# Altium PCB v3.0_ser_plytka.PcbDoc
Units mm, origin at the board's own origin, x right, y up, seen from the top; angles counter-clockwise.
Board outline 91 x 25 mm, 2 copper layers (Top Layer, Bottom Layer); 94 components, 70 nets, 327 pads, 311 vias.
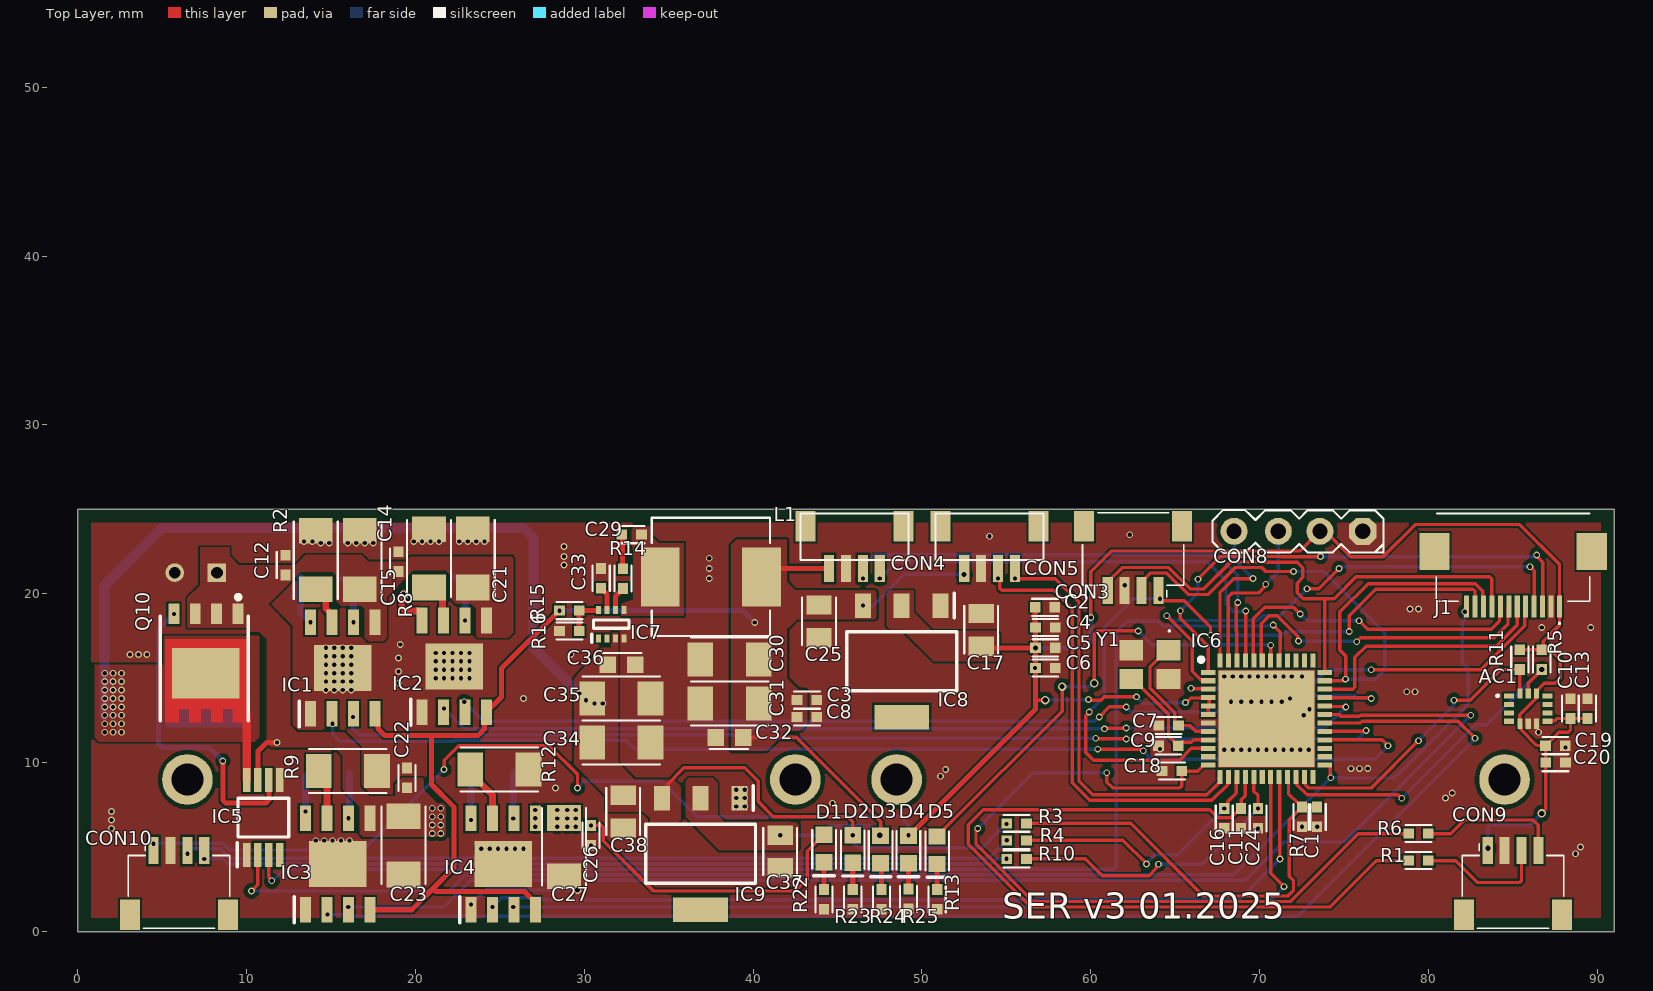
[diagram p0: Top Layer view]
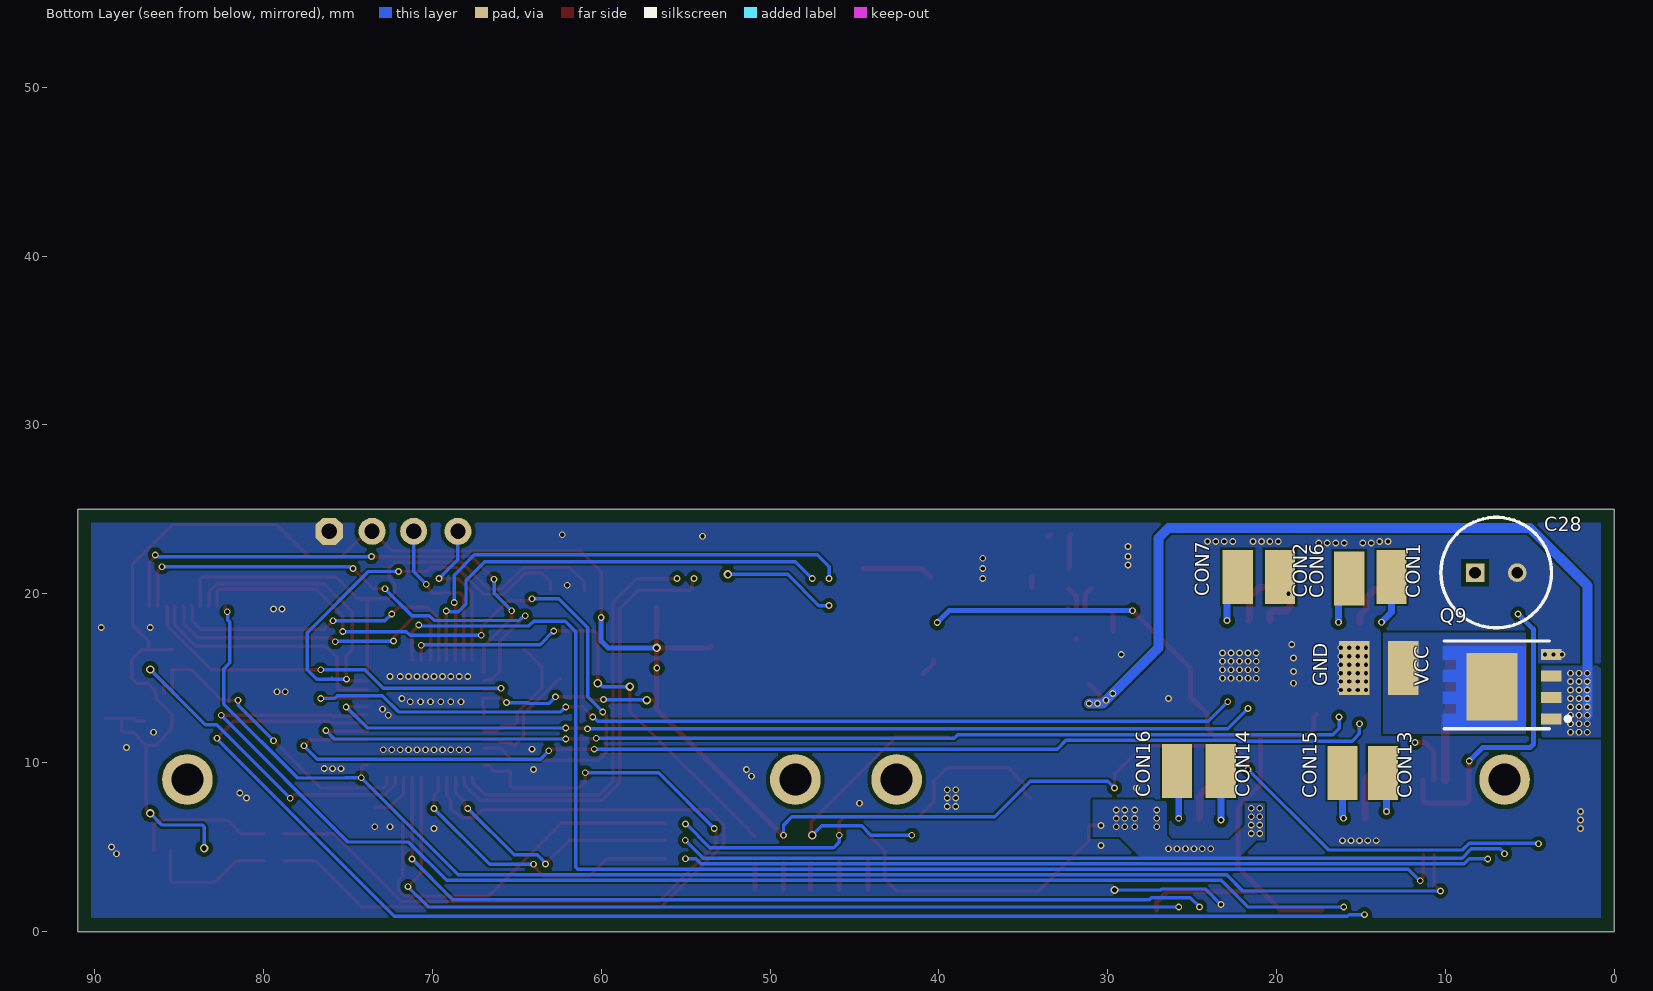
[diagram p1: Bottom Layer view, seen from below]
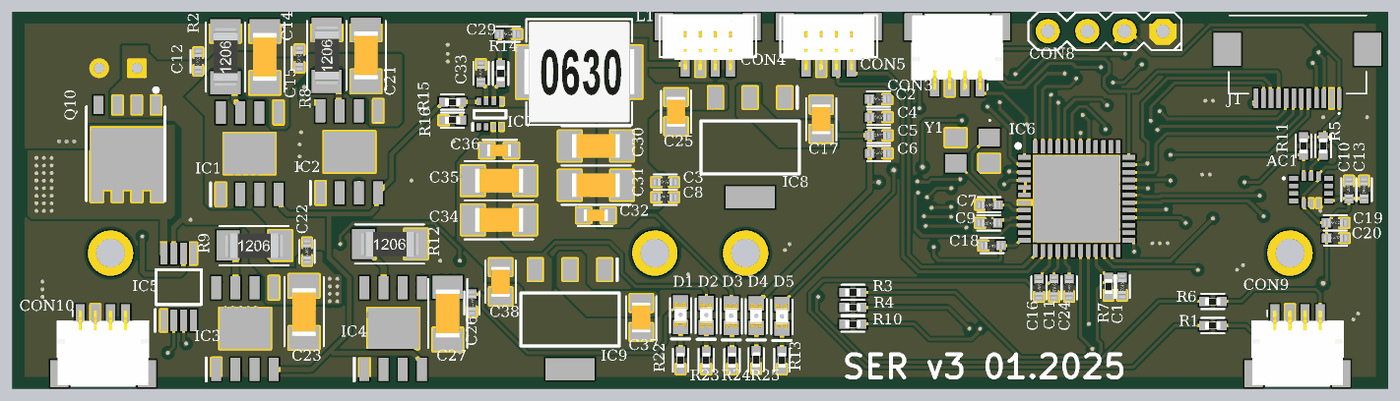
[diagram p2: 3D render of the assembled board from above, using the file's embedded part models]

## Layer stack, top to bottom
Top Solder: solder mask 0.0102, Solder Resist, Dk 3.5
Top Layer: signal copper 0.0356
Dielectric 1: dielectric 0.32, FR-4, Dk 4.8
Bottom Layer: signal copper 0.0356
Bottom Solder: solder mask 0.0102, Solder Resist, Dk 3.5

## Board outline
0,0 91,0 91,25 0,25

## Design rules (kind name [scope] priority, off if disabled: settings)
BoardOutlineClearance [All] p1: gap=0.8 ignorepadtopadclearanceinfootprint=FALSE
Clearance [All] p1: gap=0.127 ignorepadtopadclearanceinfootprint=TRUE except(0.2: Arc-THPad Track-THPad SMDPad-THPad; 0.254: THPad-Fill THPad-Poly THPad-Region Via-Fill Via-Poly Via-Region; 0.33: Arc-Hole Track-Hole SMDPad-Hole THPad-Hole Via-Hole Fill-Hole Poly-Hole Region-Hole; 0.5: THPad-THPad)
ComponentClearance [All] p1 off: gap=0.254 collisioncheckmode=3 verticalgap=0.254 showdistances=FALSE
HoleSize [All] p1: absolutevalues=TRUE maxlimit=4 minlimit=0.02 maxpercent=80.000 minpercent=20.000
HoleToHoleClearance [All] p1: gap=0.127 allowstackedmicrovias=TRUE
PlaneClearance [All] p1: clearance=0.3
PlaneConnect PlaneConnect_1 [(HasFootprint('R 2512'))] p1: planeconnectstyle=Relief reliefexpansion=0.508 reliefentries=4 reliefconductorwidth=0.254 reliefairgap=0.254
PlaneConnect [All] p2: planeconnectstyle=Relief reliefexpansion=0.508 reliefentries=4 reliefconductorwidth=0.254 reliefairgap=0.254
PolygonConnect "Polygon Power Connection" [(HasFootprint('DFN 5x6')) OR  (HasFootprint('R 2512')) OR  IsVia OR  HasFootprint('SMD PAD')  OR  (HasFootprint('DJNR60454R5FERROCORE'))  OR  (HasFootprint ('SON50P200X200X80-9N-D')) OR (HasFootprint('SOT230P700X180-4N'))  OR    InNetClass('Power')] p1: connectstyle=Direct reliefconductorwidth=0.254 reliefentries=4 polygonreliefangle="90 Angle" airgapwidth=0.254 // Conection to high power components
PolygonConnect [All] p2: connectstyle=Direct reliefconductorwidth=0.254 reliefentries=4 polygonreliefangle="90 Angle" airgapwidth=0.254
RoutingVias [All] p1: holewidth=0.3 width=0.5 viastyle="Through Hole" minholewidth=0.2 minwidth=0.3 maxholewidth=1 maxwidth=1.27
ShortCircuit [All] p1: allowed=TRUE
SilkToSilkClearance [All] p1: silktosilkclearance=0.127
SolderMaskExpansion "Tented Vias" [IsVia] p1: expansion=0.102 istentingtop=TRUE
SolderMaskExpansion [All] p2: expansion=0.102 istentingtop=FALSE
Width [All] p1: maxlimit=1 minlimit=0.127 preferedwidth=0.3 minimp=50.000000 maximp=50.000000 favimp=50.000000
23 further rules are at their usual default settings.

## Classes and differential pairs
component class MCU-and-ICs: AC1 C1 C2 C6 C7 C9 C10 C13 C19 C20 CON3 IC6 J1 R3 R5 R7 R11 Y1
component class Interface1: C28 CON8 D1 D2 D3 D4 D5 GND IC5 Q9 Q10 R13 R22 R23 R24 R25 VCC
component class dc_drivers: C12 C14 C15 C21 C22 C23 C26 C27 CON1 CON2 CON6 CON7 CON13 CON14 CON15 CON16 IC1 IC2 IC3 IC4 R2 R8 R9 R12
component class DC-DC: C17 C25 C29 C30 C31 C32 C33 C34 C35 C36 C37 C38 IC7 IC8 IC9 L1 R14 R15 R16
component class Connectors-and-Filters: C3 C4 C5 C8 C11 C16 C18 C24 CON4 CON5 CON9 CON10 R1 R4 R6 R10

## Components (designator, comment, footprint, x,y, rotation, side; value= is the part's Value field where it differs from the comment)
AC1 "LSM6DSOXTR" LGA-14_1 85.9,13.2 r0 top
C1 "1uF" "C 0402" 73.4,6.784 r270 top
C2 "1uF" "C 0402" 57.284,19.2 r0 top
C3 "100nF" "C 0402" 43.184,13.7 r0 top
C4 "100nF" "C 0402" 57.3,18 r0 top
C5 "100nF" "C 0402" 57.3,16.8 r0 top
C6 "100nF" "C 0402" 57.3,15.6 r0 top
C7 "22pF" "C 0402" 64.6,12.2 r180 top
C8 "100nF" "C 0402" 43.184,12.7 r0 top
C9 "22pF" "C 0402" 64.584,11 r180 top
C10 "100nF" "C 0402" 88.4,13.2 r90 top
C11 "22nF" "C 0402" 68.9,6.7 r270 top
C12 "0.1uF" "C 0402" 12.3,21.7 r90 top
C13 "1uF" "C 0402" 89.4,13.2 r90 top
C14 "47uF" "C 1206" 16.7,22 r90 top
C15 "0.1uF" "C 0402" 19,21.9 r90 top
C16 "22nF" "C 0402" 67.9,6.7 r270 top
C17 "22uF" "C 0805" 53.5,17.865 r90 top
C18 "22nF" "C 0402" 64.8,9.5 r180 top
C19 "1uF" "C 0402" 87.5,11 r0 top
C20 "100nF" "C 0402" 87.516,10 r0 top
C21 "47uF" "C 1206" 23.4,22.1 r90 top
C22 "0.1uF" "C 0402" 19.5,9.1 r90 top
C23 "47uF" "C 1206" 19.3,5.1 r270 top
C24 "22nF" "C 0402" 69.9,6.7 r270 top
C25 "10uF" "C 0805" 43.9,18.365 r270 top
C26 "0.1uF" "C 0402" 30.4,5.7 r270 top
C27 "47uF" "C 1206" 28.8,5 r270 top
C28 "UVY1V101MED1TD" CAPPRD250W50D655H1250 8.25,21.25 r180 bottom
C29 "100nF" "C 0402" 32.8,23.5 r0 top
C30 "22uF" "C 1206" 38.6,16.1 r180 top
C31 "22uF" "C 1206" 38.6,13.5 r180 top
C32 "100nF" "C 0603" 38.6,11.5 r180 top
C33 "33nF" "C 0402" 31,20.916 r90 top
C34 "10uF" "C 1206" 32.2,11.2 r0 top
C35 "10uF" "C 1206" 32.2,13.8 r0 top
C36 "100nF" "C 0603" 32.2,15.8 r0 top
C37 "22uF" "C 0805" 41.6,4.735 r270 top
C38 "10uF" "C 0805" 32.3,7.1 r270 top
CON1 "3 Pin" "SMD PAD" 13.2,21 r180 bottom
CON2 "3 Pin" "SMD PAD" 19.8,21 r180 bottom
CON3 "4 PIN" SM04B-SRSS-TB 62.5,23 r0 top
CON4 "4 PIN" BM04B-SRSS-TB 46,23 r0 top
CON5 "4 PIN" BM04B-SRSS-TB 54,23 r0 top
CON6 "3 Pin" "SMD PAD" 15.7,20.9 r180 bottom
CON7 "3 Pin" "SMD PAD" 22.3,21 r180 bottom
CON8 "4 PIN" "Goldpin 2.54 4P" 72.29,23.7 r180 top
CON9 "4 PIN" SM04B-SRSS-TB 85,2.002 r180 top
CON10 "4 PIN" SM04B-SRSS-TB 6,2.002 r180 top
CON13 "1 Pin" "SMD PAD" 13.7,9.4 r180 bottom
CON14 "1 Pin" "SMD PAD" 23.3,9.5 r180 bottom
CON15 "1 Pin" "SMD PAD" 16.1,9.4 r0 bottom
CON16 "1 Pin" "SMD PAD" 25.9,9.5 r0 bottom
D1 "LED BLUE" "LED 0603 BLUE" 44.2,4.913 r270 top
D2 "LED BLUE" "LED 0603 BLUE" 45.9,4.887 r270 top
D3 "LED BLUE" "LED 0603 BLUE" 47.55,4.85 r270 top
D4 "LED BLUE" "LED 0603 BLUE" 49.2,4.85 r270 top
D5 "LED BLUE" "LED 0603 BLUE" 50.9,4.813 r270 top
GND "GND" "SMD PAD" 15.4,15.6 r0 bottom (schematic designator CON12)
IC1 "DRV8251DDAR" SOIC127P600X170-9N 15.7,15.6 r90 top
IC2 "DRV8251DDAR" SOIC127P600X170-9N 22.3,15.7 r90 top
IC3 "DRV8251DDAR" SOIC127P600X170-9N 15.4,4 r90 top
IC4 "DRV8251DDAR" SOIC127P600X170-9N 25.2,4 r90 top
IC5 "MAX1614EUA+" SOP65P490X110-8N 11,6.75 r90 top
IC6 "STM32G061C6U6" QFN50P700X700X60-49N-D 70.4,12.6 r0 top
IC7 "TPS62933DRLR" SOTFL50P160X60-8N 31.6,18.2 r90 top
IC8 "AMS1117-3.3" SOT229P700X180-4N 48.8,16 r270 top
IC9 "AMS1117-3.3" SOT229P700X180-4N 36.89,4.6 r270 top
J1 "XF3M-1215-1B" XF3M12151B 85,22 r180 top
L1 "6.8uH" HPI0630 37.5,21 r0 top
Q9 "AON6403" "DFN 5x6" 6.65,14.5 r90 bottom
Q10 "Model?" "DFN 5x6" 7.6,15.9 r180 top
R1 "8k" "R 0402" 79.4,4.2 r0 top
R2 "0.2" "R 1206" 14.1,22 r90 top
R3 "47k" "R 0402" 55.6,6.4 r180 top
R4 "8k" "R 0402" 55.6,5.4 r180 top
R5 "3k" "R 0402" 86.7,16.1 r90 top
R6 "8k" "R 0402" 79.4,5.8 r0 top
R7 "13k" "R 0402" 72.5,6.784 r90 top
R8 "0.2" "R 1206" 20.8,22.1 r90 top
R9 "0.2" "R 1206" 16,9.5 r0 top
R10 "8k" "R 0402" 55.6,4.3 r180 top
R11 "3k" "R 0402" 85.4,16.1 r90 top
R12 "0.2" "R 1206" 24.973,9.6 r0 top
R13 "160R" "R 0402" 50.9,1.9 r270 top
R14 "0" "R 0402" 32.3,20.9 r270 top
R15 "100k" "R 0402" 29.116,19 r0 top
R16 "10K" "R 0402" 29.116,17.8 r0 top
R22 "2k" "R 0402" 44.2,1.9 r270 top
R23 "2k" "R 0402" 45.9,1.9 r270 top
R24 "500R" "R 0402" 47.6,1.9 r270 top
R25 "160R" "R 0402" 49.2,1.934 r270 top
VCC "Battery" "SMD PAD" 12.5,15.6 r0 bottom (schematic designator CON11)
Y1 "MCSJK-7U-16.00-12-30-80-B-30" MCSJK7U1600123080B30 63.5,15.8 r180 top

## Footprints (in the part's own frame and the unit in brackets; to place one, negate y for a bottom-side part, rotate by r counter-clockwise, add the part's x,y. Pads: shape width x height; smd on the part's side, far side on the other; paste and mask are expansions set on the pad)
BM04B-SRSS-TB [mm]
  rect 0.6x1.6 smd: 1(-1.5,-1.5) 2(-0.5,-1.5) 3(0.5,-1.5) 4(1.5,-1.5)
  rect 1.2x1.8 smd: A(-2.9,1) B(2.9,1)
  silkscreen extent -3.2,-1 3.2,1.75, body extent -3,-1.9 3,1.7, height 4.25
"C 0402" [mm] "MLCC Capacitor 0402"
  rect 0.635x0.6 smd: 1(-0.584,0) 2(0.584,0)
  silkscreen extent -0.76,-0.51 0.76,0.51, body extent -0.76,-0.25 0.74,0.25, height 0.35
"C 0603" [mil]
  rect 38x39.37 smd: 1(-32,0) 2(32,0)
  silkscreen extent -43,-28 47,28, body extent -31,-16 31,16, height 24
"C 0805" [mil]
  rect 45x59.06 smd: 1(-38,0) 2(38,0)
  silkscreen extent -55,-39 55,39, body extent -39,-25 39,25, height 49
"C 1206" [mil]
  rect 60x78.74 smd: 1(-68,0) 2(68,0)
  silkscreen extent -91,-51 89,51, body extent -63,-31 63,31, height 59
CAPPRD250W50D655H1250 [mm]
  rect 1.1x1.1 hole 0.7: 1(0,0)
  round 1.1 hole 0.7: 2(2.5,0)
  silkscreen extent -2.02,-3.27 4.52,3.27, body extent -2.15,-3.4 4.65,3.4, height 12.5
"DFN 5x6" [mm] "PowerMOSFET"
  rect 0.65x1.2 smd: 1(-1.905,-2.91) 2(-0.635,-2.91) 3(0.635,-2.91) 4(1.905,-2.91)
  rect 4x3 smd: 5_8(0,0.6)
  Top Layer region: -2.4,-1.4 -2.4,3.5 -1.6,3.5 -1.6,2.7 -1,2.7 -1,3.5 -0.3,3.5 -0.3,2.7 0.3,2.7 0.3,3.5 1,3.5 1,2.7 1.6,2.7 1.6,3.5 2.4,3.5 2.4,-1.4
  silkscreen extent -2.5,-4.02 2.7,3.42, body extent -2.5,-3.27 2.5,3.26, height 1.2
"Goldpin 2.54 4P" [mm]
  oct 1.6x1.6 hole 0.9: 1(-3.81,0)
  round 1.6 hole 0.9: 2(-1.27,0) 3(1.19,0) 4(3.81,0)
  silkscreen extent -5.04,-1.27 5.08,1.27
HPI0630 [mm] "Power Inductor"
  rect 2.3x3.5 smd: 1(-3,0) 2(3,0)
  silkscreen extent -3.5,-3.5 3.5,3.5, body extent -3.65,-3.35 3.65,3.35, height 2.81
"LED 0603 BLUE" [mil]
  rect 38x39.37 smd: 1(-32,0) 2(32,0)
  silkscreen extent -43,-28 63,28, body extent -31,-16 31,16, height 22
LGA-14_1 [mm]
  rect 0.6x0.3 smd: 1(-1.15,0.75) 2(-1.15,0.25) 3(-1.15,-0.25) 4(-1.15,-0.75) 8(1.15,-0.75) 9(1.15,-0.25) 10(1.15,0.25) 11(1.15,0.75)
  rect 0.3x0.6 smd: 5(-0.5,-0.9) 6(0,-0.9) 7(0.5,-0.9) 12(0.5,0.9) 13(0,0.9) 14(-0.5,0.9)
  silkscreen extent -1.83,0.74 -1.8,0.77, body extent -1.62,-1.25 1.38,1.25, height 0.86
MCSJK7U1600123080B30 [mm]
  rect 1.4x1.2 smd: 1(-1.1,-0.85) 2(1.1,-0.85) 3(1.1,0.85) 4(-1.1,0.85)
  silkscreen extent -1.2,-2.05 -1.1,-1.95, body extent -1.68,-1.33 1.68,1.33, height 0.9
QFN50P700X700X60-49N-D [mm]
  rect 0.85x0.3 smd: 1(-3.45,2.75) 2(-3.45,2.25) 3(-3.45,1.75) 4(-3.45,1.25) 5(-3.45,0.75) 6(-3.45,0.25) 7(-3.45,-0.25) 8(-3.45,-0.75) 9(-3.45,-1.25) 10(-3.45,-1.75) 11(-3.45,-2.25) 12(-3.45,-2.75) 25(3.45,-2.75) 26(3.45,-2.25) 27(3.45,-1.75) 28(3.45,-1.25) 29(3.45,-0.75) 30(3.45,-0.25) 31(3.45,0.25) 32(3.45,0.75) 33(3.45,1.25) 34(3.45,1.75) 35(3.45,2.25) 36(3.45,2.75)
  rect 0.3x0.85 smd: 13(-2.75,-3.45) 14(-2.25,-3.45) 15(-1.75,-3.45) 16(-1.25,-3.45) 17(-0.75,-3.45) 18(-0.25,-3.45) 19(0.25,-3.45) 20(0.75,-3.45) 21(1.25,-3.45) 22(1.75,-3.45) 23(2.25,-3.45) 24(2.75,-3.45) 37(2.75,3.45) 38(2.25,3.45) 39(1.75,3.45) 40(1.25,3.45) 41(0.75,3.45) 42(0.25,3.45) 43(-0.25,3.45) 44(-0.75,3.45) 45(-1.25,3.45) 46(-1.75,3.45) 47(-2.25,3.45) 48(-2.75,3.45)
  rect 5.7x5.7 smd: 49(0,0)
  silkscreen extent -4,3.38 -3.75,3.62, body extent -3.56,-3.56 3.56,3.56, height 0.61
"R 0402" [mm] "0402 resistor Chip"
  rect 0.635x0.6 smd: 1(-0.584,0) 2(0.584,0)
  silkscreen extent -0.76,-0.51 0.76,0.51, body extent -0.5,-0.25 0.5,0.25, height 0.31
"R 1206" [mil]
  rect 60x78.74 smd: 1(-68,0) 2(68,0)
  silkscreen extent -91,-51 89,51, body extent -75,-32 75,31, height 24
SM04B-SRSS-TB [mm]
  rect 0.6x1.6 smd: 1(1.5,-2.8) 2(0.5,-2.8) 3(-0.5,-2.8) 4(-1.5,-2.8)
  rect 1.2x1.8 smd: A(-2.9,1) B(2.9,1)
  silkscreen extent -3,-3.2 3,1.8, body extent -3,-3.2 3,1.75, height 2.9
"SMD PAD" [mm]
  rect 1.8x3.2 smd: 1(0,0)
SOIC127P600X170-9N [mm]
  rect 1.525x0.65 smd: 1(-2.712,1.905) 2(-2.712,0.635) 3(-2.712,-0.635) 4(-2.712,-1.905) 5(2.712,-1.905) 6(2.712,-0.635) 7(2.712,0.635) 8(2.712,1.905)
  rect 2.71x3.4 smd: 9(0,0)
  silkscreen extent -3.47,2.58 -1.95,2.58, body extent -3,-2.45 3,2.45, height 1.7
SOP65P490X110-8N [mm]
  rect 1.425x0.45 smd: 1(-2.212,0.975) 2(-2.212,0.325) 3(-2.212,-0.325) 4(-2.212,-0.975) 5(2.212,-0.975) 6(2.212,-0.325) 7(2.212,0.325) 8(2.212,0.975)
  silkscreen extent -2.93,-1.5 1.15,1.55, body extent -2.45,-1.5 2.45,1.5, height 1.1
SOT229P700X180-4N [mm]
  rect 1.45x0.95 smd: 1(-3.3,2.29) 2(-3.3,0) 3(-3.3,-2.29)
  rect 1.45x3.25 smd: 4(3.3,0)
  silkscreen extent -4.03,-3.25 1.75,3.25, body extent -3.35,-3.15 3.35,3.15, height 1.8
SOTFL50P160X60-8N [mm]
  rect 0.475x0.3 smd: 1(-0.838,0.75) 2(-0.838,0.25) 3(-0.838,-0.25) 4(-0.838,-0.75) 5(0.838,-0.75) 6(0.838,-0.25) 7(0.838,0.25) 8(0.838,0.75)
  silkscreen extent -1.07,-1.05 0.25,1.15, body extent -0.8,-1.02 0.8,1.08, height 0.6
XF3M12151B [mm]
  rect 0.3x1.3 smd: 1(-2.75,2.75) 2(-2.25,2.75) 3(-1.75,2.75) 4(-1.25,2.75) 5(-0.75,2.75) 6(-0.25,2.75) 7(0.25,2.75) 8(0.75,2.75) 9(1.25,2.75) 10(1.75,2.75) 11(2.25,2.75) 12(2.75,2.75)
  rect 1.8x2.2 smd: MP1(-4.65,-0.5) MP2(4.65,-0.5)
  silkscreen extent -4.55,-2.75 4.55,3.8, body extent -5.05,-2.77 5.05,3.63, height 2

## Part data
AC1: "Accelerometer", Manufacturer_Name=STMicroelectronics, Mouser Part Number=511-LSM6DSOXTR, Arrow Part Number=LSM6DSOXTR, Arrow Price/Stock=https://www.arrow.com/en/products/lsm6dsoxtr/stmicroelectronics?region=europe, Datasheet Link=https://www.st.com/resource/en/datasheet/lsm6dsox.pdf, Manufacturer_Part_Number=LSM6DSOXTR, Mouser Price/Stock=https://www.mouser.co.uk/ProductDetail/STMicroelectronics/LSM6DSOXTR?qs=l7cgNqFNU1i9dcjzItLpVQ%3D%3D
C1 C2 C3 C4 C5 C6 C7 C8 C9 C10 C11 C12 C13 C14 C15 C16 C17 C18 C19 C20 C21 C22 C23 C24 C25 C26 C27 C29 C30 C31 C32 C33 C34 C35 C36 C37 C38: library part Capacitor, "MLCC Capacitor"
C28: "Capacitor Polarised", Manufacturer_Name=Nichicon, Arrow Part Number=UVY1V101MED1TD, Arrow Price/Stock=https://www.arrow.com/en/products/uvy1v101med1td/nichicon, Datasheet Link=http://nichicon-us.com/english/products/pdfs/e-uvy.pdf, Height=12.5mm, Manufacturer_Part_Number=UVY1V101MED1TD
CON1 CON2 CON6 CON7 GND VCC: library part "1 Pin"
IC1 IC2 IC3 IC4: "Integrated Circuit", Manufacturer_Name="Texas Instruments", Mouser Part Number=595-DRV8251DDAR, Arrow Part Number=DRV8251DDAR, Arrow Price/Stock=https://www.arrow.com/en/products/drv8251ddar/texas-instruments?region=nac, Datasheet Link=https://www.arrow.com/en/products/drv8251ddar/texas-instruments?region=nac, Height=1.7mm, Manufacturer_Part_Number=DRV8251DDAR, Mouser Price/Stock=https://www.mouser.co.uk/ProductDetail/Texas-Instruments/DRV8251DDAR?qs=doiCPypUmgHTzZyfapGahQ%3D%3D
IC5: "Integrated Circuit", Manufacturer_Name="Analog Devices", Mouser Part Number=700-MAX1614EUA, Arrow Part Number=MAX1614EUA+, Arrow Price/Stock=https://www.arrow.com/en/products/max1614eua/maxim-integrated?region=nac, Datasheet Link=http://datasheets.maximintegrated.com/en/ds/MAX1614.pdf, Height=1.1mm, Manufacturer_Part_Number=MAX1614EUA+, Mouser Price/Stock=https://www.mouser.co.uk/ProductDetail/Analog-Devices-Maxim-Integrated/MAX1614EUA%2b?qs=1THa7WoU59FiDBRRbRrFJA%3D%3D
IC6: "Integrated Circuit", Manufacturer_Name=STMicroelectronics, Mouser Part Number=511-STM32G061C6U6, Datasheet Link=https://www.st.com/resource/en/datasheet/stm32g061c6.pdf, Height=0.6mm, Manufacturer_Part_Number=STM32G061C6U6, Mouser Price/Stock=https://www.mouser.co.uk/ProductDetail/STMicroelectronics/STM32G061C6U6?qs=CiayqK2gdcKUDq0OUzUqqg%3D%3D
IC7: "Integrated Circuit", Manufacturer_Name="Texas Instruments", Mouser Part Number=595-TPS62933DRLR, Arrow Part Number=TPS62933DRLR, Arrow Price/Stock=https://www.arrow.com/en/products/tps62933drlr/texas-instruments?utm_currency=USD&region=nac, Datasheet Link=https://www.ti.com/lit/ds/symlink/tps62933.pdf?ts=1626073394234, Height=0.6mm, Manufacturer_Part_Number=TPS62933DRLR, Mouser Price/Stock=https://www.mouser.co.uk/ProductDetail/Texas-Instruments/TPS62933DRLR?qs=Rp5uXu7WBW9fv47wfQVntQ%3D%3D
IC8 IC9: "Integrated Circuit", Manufacturer_Name=Advanced, Datasheet Link=https://datasheet.datasheetarchive.com/originals/distributors/Datasheets-28/DSA-550594.pdf, Height=1.8mm, Manufacturer_Part_Number=AMS1117-3.3
J1: "Connector", Manufacturer_Name="Omron Electronics", Mouser Part Number=653-XF3M-1215-1B, Arrow Part Number=XF3M-1215-1B, Arrow Price/Stock=https://www.arrow.com/en/products/xf3m-1215-1b/omron, Datasheet Link=https://datasheet.lcsc.com/szlcsc/Omron-Electronics-XF3M-1215-1B_C231431.pdf, Height=2mm, Manufacturer_Part_Number=XF3M-1215-1B, Mouser Price/Stock=https://www.mouser.co.uk/ProductDetail/Omron-Electronics/XF3M-1215-1B?qs=1He0yLMpldAQYeSJcjbchQ%3D%3D
L1: library part Inductor, "General pourpouse inductor"
Q9: "P-Mosfet 30V 67A Rds(on) 3.1mR"
Q10: library part "Power MOSFET", "N-Mosfet DFN 5x6"
R1 R2 R3 R4 R5 R6 R7 R8 R9 R10 R11 R12 R13 R14 R15 R16 R22 R23 R24 R25: library part Resistor, "General pourpouse resistor"
Y1: "Crystal or Oscillator", Manufacturer_Name=MULTICOMP, Datasheet Link=https://www.farnell.com/datasheets/2864166.pdf, Height=0.8mm, Manufacturer_Part_Number=MCSJK-7U-16.00-12-30-80-B-30

## Free pads (board coordinates)
  round 3 hole 1.9: 1(6.5,9) 1(42.5,9) 1(48.5,9) 1(84.5,9)

## Via types
v1: diameter 0.4, hole 0.25, Top Layer to Bottom Layer, tented both sides, 301 vias
v2: diameter 0.5, hole 0.3, Top Layer to Bottom Layer, tented both sides, 10 vias

## Nets (pads, with @x,y where several pads share a name; then routed paths per layer and width w, separated by ;. In a path a pad name is that pad's centre, name@x,y a point inside that pad or via, vN(x,y) a via of type N, cw(c..) or ccw(c..) an arc to the next point about the centre after c; other vN are vias at no path point)
3.3V: AC1.5 AC1.8 AC1.12 C2.1 C4.1 C5.1 C6.1 C10.1 C13.1 C17.1 C19.1 C20.1 CON8.2 CON9.1 CON10.1 D4.1 IC6.4 IC6.5 IC6.6 IC8.2 J1.1 R5.2 R11.2 | length 150.9
  Top Layer w0.2: v1(21.7,9.6) 21.7,10.137 22.563,11 27.9,11 29.6,9.3 v1(29.6,8.5) ; 56.716,13.7 v2(57.3,13.7) ; v1(59.858,13.742) 59.896,13.704 60.35,13.704 60.354,13.7 60.6,13.7 60.795,13.895 v1(62.7,13.895) ; v1(60,18.6) 60,21.3 61.236,22.536 72.396,22.536 CON8.2 73.877,23.7 75.377,22.2 77.3,22.2 79.2,24.1 85.385,24.1 87.75,21.735 J1.1 87.75,18.15 86.785,17.185 86.785,16.769 R5.2 ; v1(65.6,13.555) 65.654,13.555 65.925,13.826 66.926,13.826 IC6.4 67,13.8 67,13.4 IC6.5 IC6.6 ; R11.2 R5.2 ; AC1.12@86.45,14.15 AC1.12 ; v2(86.7,7) 86.932,7.232 C20.1 86.932,10.984 C19.1 ; AC1.8 87.087,12.487 87.487,12.487 87.616,12.616 C10.1 ; C13.1 C10.1 ; AC1.12 86.35,14.05 86.35,13.779 85.874,13.303 85.4,12.829 AC1.5 85.45,12.25 85.45,11.979 86.415,11.014 86.902,11.014 C19.1 ; AC1.12 86.4,14.25 86.85,14.7 87.5,14.7 87.8,15 87.8,16.1 87.216,16.684 R5.2 ; C19.1 86.933,11 87.133,11.2 87.133,11.218 87.31,11.394 87.716,11.8 88.283,11.8 88.4,11.917 C10.1
  Top Layer w0.3: D4.1 49.217,5.663 56.716,13.161 56.716,13.7 C6.1 ; C17.1 53.6,16.8 v2(56.716,16.8) ; v1(56.7,15.6) 56.716,15.616 v2(56.716,16.8) ; C2.1 56.708,19.192 56.708,18.008 C4.1 v2(56.716,16.8)
  Bottom Layer w0.2: v1(4.5,5.2) 4.527,5.227 8.6,5.227 9,4.827 16.927,4.827 v1(21.7,9.6) ; v1(29.6,8.5) 30,8.9 34.6,8.9 36.7,6.8 48.7,6.8 49.2,6.3 v1(49.2,5.7) ; v2(57.3,13.7) 57.321,13.721 59.836,13.721 v1(59.858,13.742) ; v1(62.7,13.895) 63.095,13.5 64.293,13.5 64.348,13.555 v1(65.6,13.555) ; CON8.2 CON8.2@73.581,23.679 ; v2(83.507,4.931) 83.507,6.19 83.624,6.307 86.007,6.307 v2(86.7,7)
  Bottom Layer w0.3: v2(56.716,16.8) 59.6,16.8 60,17.2 v1(60,18.6)
5V: C3.1 C8.1 C25.1 C30.1 C31.1 C32.1 C37.1 CON4.1 CON5.1 D3.1 IC1.4 IC2.4 IC3.4 IC4.4 IC8.3 IC9.2 L1.2 R15.1 | length 79
  Top Layer w0.2: C32.1 42.546,11.5 47.55,6.496 D3.1@47.55,5.7
  Top Layer w0.3: IC3.4 19.788,1.288 21.044,2.544 ; IC1.4 17.78,12.713 17.78,12.02 18.2,11.6 20.95,11.6 ; IC4.4 27.105,1.725 26.462,2.368 21.22,2.368 21.044,2.544 ; v1(28.532,19) 28.514,19 25.1,15.586 25.1,13.883 24.085,12.868 24.085,11.985 23.7,11.6 20.95,11.6 ; C30.1 40.327,15.862 C30.1@40.939,15.25 ; L1.2 41,21.5 CON4.1 ; 20.95,11.6 20.95,8.706 22.3,7.356 22.3,3.8 21.044,2.544
  Bottom Layer w0.2: v1(41.6,5.7) 44.022,5.7 44.577,6.255 46.945,6.255 v2(47.5,5.7) ; v1(46.51,19.3) 47.1,19.3 48.95,21.15 v2(52.5,21.15)
  Bottom Layer w0.3: v1(28.532,19) 39.4,19 v1(40.1,18.3)
12V: C34.1 C35.1 C36.1 C38.1 D2.1 IC5.8 IC7.3 IC9.3 Q9.1 Q9.2 Q9.3 Q10.5_8 R3.2 | length 80.9
  Top Layer w0.2: IC9.3 34.962,8.262 34.962,8.762 35.9,9.7 39.5,9.7 40.3,8.9 40.3,7.7 41.2,6.8 45.6,6.8 45.9,6.5 v1(45.9,5.7)
  Top Layer w0.3: C35.1 30.473,14.038 C35.1@31.085,14.65 ; IC7.3@31.85,17.274 IC7.3
  Top Layer w0.5: Q10.5_8 8,15.3 9.25,14.05 9.25,13.65 10.025,12.875 IC5.8
  Bottom Layer w0.2: v1(45.9,5.7) 45.9,5.3 46.237,4.963 53.563,4.963 54.972,6.372 v1(55,6.372)
  Bottom Layer w0.6: v1(1.6,12.8) v1(1.6,13.3) v1(1.6,13.8) v1(1.6,14.3) v1(1.6,14.8) v1(1.6,15.3) 1.6,20.5 5,23.9 26.4,23.9 27,23.3 27,16.8 v1(30.1,13.7) 30.3,13.5 v1(30.6,13.5) v1(31.1,13.5)
  other v1: 1.6,11.8 2.1,11.8 2.6,11.8 1.6,12.3 2.1,12.3 2.6,12.3 2.1,12.8 2.6,12.8 2.1,13.3 2.6,13.3 2.1,13.8 2.6,13.8 29.7,14.1 2.1,14.3 2.6,14.3 2.1,14.8 2.6,14.8 2.1,15.3 2.6,15.3
"Analog 2": C18.1 IC6.12 R6.1 | length 46.5
  Top Layer w0.2: v1(53.3,6.1) 53.2,6 53.2,5.177 56.602,1.776 71.808,1.776 75.832,5.8 R6.1 ; v1(60.945,9.4) 60.945,8.838 61.283,8.5 65.267,8.5 65.384,8.617 C18.1 66.325,9.5 66.675,9.85 IC6.12
  Bottom Layer w0.2: v1(53.3,6.1) 56.6,9.4 v1(60.945,9.4)
"Analog 4": C16.1 IC6.15 R4.1 | length 15.9
  Top Layer w0.2: R4.1 61.9,5.4 v1(63.3,4) ; v1(67.9,7.284) 68.1,7.484 68.1,7.7 68.6,8.2 68.6,9.1 IC6.15
  Bottom Layer w0.2: v1(63.3,4) 63.3,4.054 63.445,4.199 63.445,4.212 63.77,4.537 65.153,4.537 v1(67.9,7.284)
"Analog 6": C11.1 IC6.16 R1.1 | length 48.8
  Top Layer w0.2: IC6.16 69.15,8.05 68.9,7.8 C11.1 68.9,7.267 68.7,7.067 68.621,7.067 68.284,6.729 67.516,6.729 67.046,7.2 53.615,7.2 52.745,6.33 52.745,5.17 56.466,1.449 74.147,1.449 76.899,4.201 R1.1
"Analog 8": C24.1 IC6.17 R10.1 | length 17.8
  Top Layer w0.2: R10.1 59.674,4.3 60.674,3.3 63.445,3.3 63.855,3.71 63.855,3.783 64,3.928 v1(64,3.982) ; IC6.17 69.65,8.313 69.9,8.063 v1(69.9,7.284)
  Bottom Layer w0.2: v1(64,3.982) 66.598,3.982 v1(69.9,7.284)
"Analog 10": IC6.11
"Analog 12": IC6.18
"Battery Voltage": C1.1 IC6.21 R3.1 R7.2 | length 26.1
  Top Layer w0.2: R3.1 62.367,6.4 66.664,2.103 71.672,2.103 71.997,2.428 71.997,3.028 71.755,3.27 71.755,6.606 72.5,7.351 R7.2 ; IC6.21 71.7,9.1 71.7,8.168 72.282,7.586 72.3,7.586 72.5,7.386 R7.2 ; C1.1 R7.2
GND: AC1.6 AC1.7 C1.2 C2.2 C3.2 C4.2 C5.2 C6.2 C7.2 C8.2 C9.2 C10.2 C11.2 C12.2 C13.2 C14.2 C15.2 C16.2 C17.2 C18.2 C19.2 C20.2 C21.2 C22.2 C23.2 C24.2 C25.2 C26.2 C27.2 C28.2 C30.2 C31.2 C32.2 C33.2 C34.2 C35.2 C36.2 C37.2 C38.2 CON3.3 CON4.2 CON5.2 CON8.1 CON9.2 CON10.2 GND.1 IC1.1 IC1.9 IC2.1 IC2.9 IC3.1 IC3.9 IC4.1 IC4.9 IC5.1 IC5.5 IC6.7 IC6.49 IC7.4 IC8.1 IC9.1 J1.2 Q9.4 R2.2 R7.1 R8.2 R9.2 R12.2 R13.2 R16.1 R22.2 R23.2 R24.2 R25.2 Y1.2 Y1.4 | length 6.7
  Bottom Layer w0.2: v1(23.3,1.6) 24.22,2.52 26.809,2.52 26.872,2.457 v2(29.6,2.457)
  other v1: 88.7,4.6 89,5 30.4,5.1 14.1,5.382 14.6,5.382 15.1,5.382 15.6,5.382 16.1,5.382 2,6.1 69.9,6.1 72.5,6.2 73.4,6.2 2,6.6 2,7.1 39,7.4 39.5,7.4 44.7,7.6 39,7.9 39.5,7.9 81,7.9 81.4,8.2 39,8.4 39.5,8.4 28.3,8.5 51.1,9.2 51.4,9.6 64,9.6 75.4,9.645 75.9,9.645 76.402,9.655 67.9,10.765 68.4,10.765 68.9,10.765 69.4,10.765 69.9,10.765 70.4,10.765 70.9,10.765 71.4,10.765 71.9,10.765 72.4,10.765 72.9,10.765 64.1,10.8 88.1,10.9 86.5,11.8 72.6,12.8 72.942,13.158 68.3,13.6 68.9,13.6 69.5,13.6 70.1,13.6 70.7,13.6 71.3,13.6 26.4,13.8 71.8,13.8 78.7,14.2 79.2,14.2 14.7,14.3 15.2,14.3 15.7,14.3 16.2,14.3 19,14.7 14.7,14.8 15.2,14.8 15.7,14.8 16.2,14.8 21.2,15 21.7,15 22.2,15 22.7,15 23.2,15 67.9,15.1 68.4,15.1 68.9,15.1 69.4,15.1 69.9,15.1 70.4,15.1 70.9,15.1 71.4,15.1 71.9,15.1 72.5,15.1 14.7,15.3 15.2,15.3 15.7,15.3 16.2,15.3 19,15.4 21.2,15.5 21.7,15.5 22.2,15.5 22.7,15.5 23.2,15.5 14.7,15.8 15.2,15.8 15.7,15.8 16.2,15.8 21.2,16 21.7,16 22.2,16 22.7,16 23.2,16 19,16.2 14.7,16.3 15.2,16.3 15.7,16.3 16.2,16.3 3.1,16.4 3.6,16.4 4.1,16.4 29.2,16.4 21.2,16.5 21.7,16.5 22.2,16.5 22.7,16.5 23.2,16.5 14.7,16.8 15.2,16.8 15.7,16.8 16.2,16.8 19.1,17 86.7,18 89.6,18 78.9,19.1 79.4,19.1 62,20.5 37.4,20.9 37.4,21.5 28.8,21.7 37.4,22.1 28.8,22.2 28.8,22.8 14.4,23 14.9,23 16,23 16.5,23 17,23 17.5,23 13.4,23.1 13.9,23.1 19.9,23.1 20.4,23.1 20.9,23.1 21.4,23.1 22.6,23.1 23.1,23.1 23.6,23.1 24.1,23.1 54,23.4 62.3,23.5
"Kill Switch": IC5.2 IC6.25 J1.12 | length 86
  Top Layer w0.2: v1(10.3,2.4) 10.675,2.775 IC5.2 ; IC6.25 74.125,9.85 74.175,9.8 74.175,9.125 v1(74.2,9.1) ; v1(82.145,18.93) 82.25,19.035 J1.12
  Bottom Layer w0.2: v1(10.3,2.4) 22,2.4 22.964,3.364 68.464,3.364 v1(74.2,9.1) 75.16,9.1 75.17,9.09 77.975,9.09 82.355,13.47 82.355,15.551 82,15.906 82,18.33 82.107,18.436 82.107,18.891 v1(82.145,18.93)
"LED 1": IC6.43 J1.7 | length 19.3
  Top Layer w0.2: IC6.43 70.1,16.1 70.1,18.23 70.57,18.7 71.03,18.7 72.243,17.487 72.243,17.257 v1(72.3,17.2) ; v1(75.74,17.16) 75.98,17.4 83.9,17.4 84.7,18.2 84.7,19.2 J1.7
  Bottom Layer w0.2: v1(72.3,17.2) 72.32,17.18 75.72,17.18 v1(75.74,17.16)
"LED 2": IC6.44 J1.8 | length 19
  Top Layer w0.2: IC6.44 69.618,16.082 69.618,18.518 70.3,19.2 72,19.2 v1(72.4,18.8) ; v1(75.88,18.4) 75.897,18.4 76.397,17.9 83.7,17.9 84.2,18.4 84.2,19.2 J1.8
  Bottom Layer w0.2: v1(72.4,18.8) 72.8,18.4 v1(75.88,18.4)
LED_BLINK: D5.1 IC6.42 | length 28.6
  Top Layer w0.2: D5.1@50.901,5.626 50.917,5.626 51.3,6.008 51.3,6.042 58.3,13.042 v2(58.3,14.5) ; v2(60.2,14.7) 60.2,17.6 60.4,17.8 v1(62.8,17.8) ; IC6.42 70.653,16.053 70.653,16.956 v1(70.655,16.958)
  Bottom Layer w0.2: v2(58.3,14.5) 59.919,14.5 60.119,14.7 v2(60.2,14.7) ; v1(62.8,17.8) 63.617,16.983 70.63,16.983 v1(70.655,16.958)
"Line LF1": CON10.3 R4.2 | length 49.3
  Bottom Layer w0.2: v1(6.5,4.6) 6.5,4.654 6.746,4.9 8.465,4.9 9.02,4.345 53.961,4.345 v1(55.016,5.4)
"Line LF2": CON10.4 R10.2 | length 47.7
  Bottom Layer w0.2: v1(7.5,4.3) 8.602,4.3 8.884,4.018 54.096,4.018 54.387,4.309 v1(55,4.309)
"Line RF1": CON9.3 R1.2 | length 7.9
  Top Layer w0.2: R1.2 81.6,4.2 82.9,2.9 85.383,2.9 85.5,3.017 CON9.3
"Line RF2": CON9.4 R6.2 | length 8.5
  Top Layer w0.2: R6.2 81.3,5.8 82.1,6.6 86.2,6.6 86.5,6.3 CON9.4
"Low Battery": IC5.3 IC6.41 | length 77.9
  Top Layer w0.2: IC5.3 11.325,3.229 11.5,3.054 v1(11.5,3) ; v1(70.8,18.145) 71.21,17.735 71.21,16.728 71.2,16.718 71.2,16.1 IC6.41
  Bottom Layer w0.2: v1(11.5,3) 11.517,3 12.208,3.691 61.383,3.691 61.5,3.808 61.5,17.763 62.117,18.38 64,18.38 64.287,18.093 70.607,18.093 70.62,18.107 70.762,18.107 v1(70.8,18.145)
"Mosfet Kill": IC5.6 Q10.4 | length 18.7
  Top Layer w0.3: v1(8.6,10.1) 8.6,7.776 8.776,7.6 11.149,7.6 11.325,7.776 IC5.6
  Bottom Layer w0.3: v1(5.7,18.8) 4.8,17.9 4.8,11.076 4.976,10.9 7.8,10.9 v1(8.6,10.1)
NetC7_1: C7.1 IC6.8 Y1.1 | length 7.6
  Top Layer w0.2: Y1.1 64.5,16.65 63.5,15.65 63.5,14.429 64.967,12.962 64.967,12.4 65.167,12.2 C7.1 65.863,12.2 66.213,11.85 IC6.8
NetC9_1: C9.1 IC6.9 Y1.3 | length 7.1
  Top Layer w0.2: Y1.3 62.5,14.95 64.6,12.85 64.6,11.551 65.151,11 C9.1 65.368,11.2 65.955,11.2 66.105,11.35 IC6.9
NetC29_1: C29.1 R14.1 | length 2.1
  Top Layer w0.3: C29.1 32.258,23.458 32.258,21.526 R14.1
NetC29_2: C29.2 IC7.5 L1.1 | length 0.9
  Top Layer w0.3: IC7.5 IC7.5@32.35,19.125 ; C29.2@33.402,23.5 C29.2 C29.2@33.534,23.35 ; L1.1@34.5,20.4 L1.1
NetC33_1: C33.1 IC7.7 | length 1.4
  Top Layer w0.3: C33.1@31,20.314 31.35,19.964 IC7.7
NetCON1_1: CON1.1 IC1.8 | length 2.9
  Bottom Layer w0.4: CON1.1 13.2,18.907 v1(13.795,18.312)
NetCON2_1: CON2.1 IC2.8 | length 2.6
  Top Layer w0.4: v1(19.3,20) 19.191,19.891 19.191,19.209 19.425,18.975 20.27,18.975 20.395,18.85 IC2.8
NetCON6_1: CON6.1 IC1.6 | length 2.9
  Bottom Layer w0.4: CON6.1 16.335,20.265 v1(16.335,18.312)
NetCON7_1: CON7.1 IC2.6 | length 2.9
  Bottom Layer w0.4: CON7.1 22.935,20.365 v1(22.935,18.412)
NetCON11_1: Q9.5_8 VCC.1
NetCON13_1: CON13.1 IC3.8 | length 2.4
  Bottom Layer w0.4: v1(13.5,7.1) 13.5,9.2 CON13.1
NetCON14_1: CON14.1 IC4.8 | length 2.9
  Bottom Layer w0.4: v1(23.3,6.6) CON14.1
NetCON15_1: CON15.1 IC3.6 | length 2.7
  Bottom Layer w0.3: v1(16.035,6.712) 16.035,6.739 v1@16.1,6.804
  Bottom Layer w0.4: v1@16.1,6.804 CON15.1
NetCON16_1: CON16.1 IC4.6 | length 2.8
  Bottom Layer w0.3: CON16.1@25.8,9.4 CON16.1
  Bottom Layer w0.4: v1(25.8,6.7) CON16.1@25.8,9.4
NetD1_2: D1.2 R22.1 | length 1.6
  Top Layer w0.3: R22.1 D1.2
NetD2_2: D2.2 R23.1 | length 1.6
  Top Layer w0.3: R23.1 D2.2
NetD3_2: D3.2 R24.1 | length 1.6
  Top Layer w0.3: D3.2 47.6,3.987 R24.1
NetD4_2: D4.2 R25.1 | length 1.5
  Top Layer w0.3: R25.1 D4.2
NetD5_2: D5.2 R13.1 | length 1.5
  Top Layer w0.3: R13.1 D5.2
NetIC1_7: IC1.7 R2.1 | length 2.5
  Top Layer w0.3: IC1.7@14.95,18.427 IC1.7
  Top Layer w0.4: R2.1 14.138,20.273 14.7,19.711 14.7,19.114 15.065,18.75 IC1.7
NetIC2_7: IC2.7 R8.1 | length 2.5
  Top Layer w0.4: R8.1 21.038,20.373 21.6,19.811 21.6,18.477 IC2.7
NetIC3_7: IC3.7 R9.1 | length 3
  Top Layer w0.4: R9.1 14.765,9.008 IC3.7
NetIC4_7: IC4.7 R12.1 | length 3.5
  Top Layer w0.4: R12.1 23.246,9.362 23.808,8.8 23.84,8.8 24.565,8.074 IC4.7
NetIC7_6: IC7.6 R14.2 | length 1.5
  Top Layer w0.3: IC7.6 31.85,19.848 32.3,20.298 R14.2
NetIC7_8: IC7.8 R15.2 R16.2 | length 2.4
  Top Layer w0.3: R16.2 R15.2 29.719,19.019 30.85,19.019 IC7.8
OLED_SCL: CON8.3 IC6.47 | length 9.8
  Top Layer w0.2: IC6.47 68.145,16.055 68.145,19.828 68.362,20.045 69.93,20.045 70.262,20.377 70.262,20.409 70.362,20.509 v1(70.362,20.563)
  Bottom Layer w0.2: v1(70.362,20.563) 71.1,21.301 CON8.3
OLED_SDA: CON8.4 IC6.48 | length 9.6
  Top Layer w0.2: IC6.48 67.65,20.097 68.453,20.9 v1(69.6,20.9)
  Bottom Layer w0.2: CON8.4 68.48,22.02 69.1,21.4 v1(69.6,20.9)
"PWM A1": IC1.2 IC6.28 | length 68
  Top Layer w0.2: v1(60.406,10.8) 62.946,10.8 63.046,10.7 v1(63.1,10.7) ; IC6.28 77.243,11.35 77.593,11 v1(77.6,11)
  Bottom Layer w0.2: v1(15.1,12.3) 15.1,11.7 15.527,11.273 22.252,11.273 22.306,11.327 32.473,11.327 33,10.8 v1(60.406,10.8) ; v1(63.1,10.7) 63.59,10.21 76.81,10.21 v1(77.6,11)
"PWM A2": IC1.3 IC6.29 | length 63.6
  Top Layer w0.2: v1(60.292,11.445) 60.315,11.422 62.078,11.422 v1(62.1,11.4) ; IC6.29 76.104,11.85 76.12,11.867 76.262,11.867 v1(76.3,11.905)
  Bottom Layer w0.2: v1(16.3,12.7) 16.3,12.027 16.673,11.654 38.876,11.654 39.084,11.446 v1(60.292,11.445) v1(60.292,11.445) ; v1(62.1,11.4) 75.795,11.4 v1(76.3,11.905)
"PWM A3": IC2.2 IC6.32 | length 55.7
  Top Layer w0.2: v1(60.8,12) 60.828,12.027 62.072,12.027 v1(62.1,12.055) ; IC6.32 73.878,13.323 75.072,13.323 v1(75.1,13.295)
  Bottom Layer w0.2: v1(21.7,13.2) 22.9,12 v1(60.8,12) ; v1(62.1,12.055) 73.855,12.055 75.095,13.295 v1(75.1,13.295)
"PWM A4": IC2.3 IC6.33 | length 57.9
  Top Layer w0.2: v1(60.5,12.7) 61.1,13.3 v1(62.1,13.3) ; IC6.33 76.409,13.85 76.42,13.838 76.562,13.838 v1(76.6,13.8)
  Bottom Layer w0.2: v1(22.9,13.6) 24.055,12.445 60.191,12.445 60.446,12.7 v1(60.5,12.7) ; v1(62.1,13.3) 62.4,13 72,13 72.96,13.96 75.628,13.96 75.788,13.8 v1(76.6,13.8)
"PWM B1": IC3.2 IC6.30 | length 81.8
  Top Layer w0.2: IC6.30 75.96,12.35 76.07,12.46 81.74,12.46 v1(82.753,11.447)
  Bottom Layer w0.2: v1(14.8,1) 15.705,1 15.805,0.9 72.24,0.9 82.753,11.412 v1(82.753,11.447)
"PWM B2": IC3.3 IC6.31 | length 79.9
  Top Layer w0.2: IC6.31 74.697,12.85 74.807,12.74 75.888,12.74 75.948,12.8 v1(82.5,12.8)
  Bottom Layer w0.2: v1(16.023,1.455) 21.7,1.455 23.282,3.037 69.152,3.037 71.415,5.3 75,5.3 v1(82.5,12.8)
"PWM B3": IC4.2 IC6.20 | length 52.8
  Top Layer w0.2: IC6.20 71.175,9.125 71.175,4.325 v1(71.2,4.3)
  Bottom Layer w0.2: v1(24.565,1.455) 25.12,2.01 27.414,2.01 27.547,1.877 68.777,1.877 v1(71.2,4.3)
"PWM B4": IC4.3 IC6.19 | length 53
  Top Layer w0.2: IC6.19 70.65,5.527 70.645,5.522 70.645,3.455 v1(71.442,2.658)
  Bottom Layer w0.2: v1(25.8,1.455) 70.24,1.455 v1(71.442,2.658)
RESET: CON3.1 IC6.10 J1.11 | length 42.1
  Top Layer w0.2: v1(59.9,13) 59.9,12.983 59.7,12.783 59.7,10.6 60.155,10.145 63.76,10.145 63.77,10.155 65.262,10.155 65.957,10.85 IC6.10 ; v1(64.1,19.7) 64.1,19.6 64.12,19.58 65.54,19.58 67.082,18.038 67.082,17.551 v1(67.095,17.538) ; v1(75.3,17.762) 75.3,18.7 76.873,20.273 82.627,20.273 82.75,20.15 J1.11
  Bottom Layer w0.2: v1(59.9,13) 60.8,13.9 60.8,18 62.5,19.7 v1(64.1,19.7) ; v1(67.095,17.538) 71.317,17.538 71.541,17.762 v1(75.3,17.762)
SCL: AC1.13 IC6.22 R5.1 | length 20.2
  Top Layer w0.2: IC6.22 72.2,9.1 72.2,8.704 72.804,8.1 78.193,8.1 78.403,7.89 v1(78.41,7.89) ; AC1.13 85.902,14.102 85.902,14.7 86.7,15.498 v2(86.7,15.516)
  Bottom Layer w0.2: v1(78.41,7.89) 82.765,12.245 83.429,12.245 v2(86.7,15.516)
SDA: AC1.14 IC6.23 R11.1 | length 17.8
  Top Layer w0.2: IC6.23 72.7,9.1 72.7,8.704 72.906,8.498 76.598,8.498 v1(79.4,11.3) ; v1(81.5,13.7) 82.469,13.7 84.285,15.516 R11.1 AC1.14
  Bottom Layer w0.2: v1(79.4,11.3) 81.496,13.396 81.496,13.696 v1(81.5,13.7)
Start: IC6.2 J1.4 | length 30.5
  Top Layer w0.2: v1(64.5,18.7) 66,17.2 66,15.404 66.504,14.9 66.9,14.9 IC6.2 ; v1(72.8,20.3) 73.5,20.3 v1(74.7,21.5) ; v1(86,21.6) 86.25,21.35 J1.4
  Bottom Layer w0.2: v1(64.5,18.7) 64.581,18.7 64.861,18.42 69.892,18.42 70.172,18.7 71.2,18.7 v1(72.8,20.3) ; v1(74.7,21.5) 74.781,21.5 74.881,21.6 v1(86,21.6)
"Start Mod": IC6.1 J1.3 | length 30.5
  Top Layer w0.2: v1(65.3,19) 65.3,18.548 66.95,16.898 IC6.1 ; v1(66.339,20.865) 67.683,22.209 71.268,22.209 71.277,22.2 v1(73.6,22.2) ; v1(86.4,22.3) 86.4,22.222 86.75,21.872 J1.3
  Bottom Layer w0.2: v1(65.3,19) 66.339,20.039 v1(66.339,20.865) ; v1(73.6,22.2) 86.246,22.2 86.346,22.3 v1(86.4,22.3)
SWCLK: CON3.4 IC6.36 J1.9 | length 33.6
  Top Layer w0.2: CON3.4 61,20.7 61.854,21.554 64.622,21.554 65.891,20.285 66.685,20.285 68.282,21.882 70.251,21.882 70.26,21.873 72.23,21.873 72.555,21.548 72.555,20.971 72.22,20.636 72.22,20.06 72.58,19.7 73.85,19.7 ; IC6.36 73.85,19.7 ; J1.9 83.75,20.883 83.633,21 75.7,21 74.4,19.7 73.85,19.7
SWDIO: CON3.2 IC6.35 J1.10 | length 38.3
  Top Layer w0.2: CON3.2 63,20.7 63.527,21.227 64.486,21.227 65.755,19.958 66.958,19.958 68.555,21.555 70.116,21.555 70.353,21.318 v1(72,21.318) ; IC6.35 74.924,14.85 75.019,14.945 v1(75.073,14.945) ; v1@75.1,15.01 75.1,16.315 74.745,16.67 74.745,18.93 76.415,20.6 82.762,20.6 83.2,20.162 83.2,19.3 J1.10
  Bottom Layer w0.2: v1(72,21.318) 73.782,21.318 77.4,17.7 77.4,15.5 76.845,14.945 76.019,14.945 75.954,15.01 75.889,14.945 v1(75.073,14.945)
"Switch 1": IC6.3 J1.5 | length 23.5
  Top Layer w0.2: v1(65.936,14.406) 65.964,14.378 66.922,14.378 IC6.3 ; v1(76.6,15.5) 83.1,15.5 85.7,18.1 85.7,19.2 J1.5
  Bottom Layer w0.2: v1(65.936,14.406) 72.906,14.406 74,15.5 v1(76.6,15.5)
"Switch 2": IC6.34 J1.6 | length 15.1
  Top Layer w0.2: IC6.34 75.511,14.35 75.628,14.467 75.628,16.228 76.3,16.9 84,16.9 85.25,18.15 J1.6
"USART 1 RX": CON4.3 IC6.46 | length 28.8
  Top Layer w0.2: IC6.46 68.645,16.055 68.645,17.777 68.62,17.802 68.62,19.356 68.7,19.436 v1(68.7,19.49)
  Bottom Layer w0.2: v1(46.5,20.9) 46.5,21.6 47.2,22.3 67.5,22.3 68.7,21.1 v1(68.7,19.49)
"USART 1 TX": CON4.4 IC6.45 | length 27.1
  Top Layer w0.2: IC6.45 69.175,16.075 v1(69.175,18.975)
  Bottom Layer w0.2: v1(47.5,20.9) 48.5,21.9 66.9,21.9 68,20.8 68,19.405 68.47,18.935 68.93,18.935 68.957,18.962 69.162,18.962 v1(69.175,18.975)
"USART 2 RX": CON5.3 IC6.14 | length 26.2
  Top Layer w0.2: v1(54.5,20.9) 54.6,20.8 54.6,20.317 54.717,20.2 57.8,20.2 58.9,19.1 58.9,8.8 59.927,7.773 67.169,7.773 68.1,8.704 68.1,9.1 IC6.14
"USART 2 TX": CON5.4 IC6.13 | length 24.3
  Top Layer w0.2: v1(55.5,20.9) 55.6,20.9 57.9,20.9 59.3,19.5 59.3,8.9 60.1,8.1 66.875,8.1 67.6,8.825 67.6,9.1 IC6.13
VCC: C12.1 C14.1 C15.1 C21.1 C22.1 C23.1 C26.1 C27.1 C28.1 D1.1 IC1.5 IC2.5 IC3.5 IC4.5 IC5.7 Q10.1 Q10.2 Q10.3 | length 21.3
  Top Layer w0.2: v1(30.4,6.284) 30.999,6.284 31.116,6.167 31.116,5.384 34.1,2.4 42.5,2.4 43.2,3.1 43.2,4.743 44.183,5.726 D1.1
  Top Layer w0.3: IC5.7 10.675,10.675 11.181,11.181 11.781,11.181 v1(11.8,11.2)
  other v1: 21,5.8 21.5,5.8 27.1,6.2 28.4,6.2 29,6.2 29.5,6.2 21,6.3 21.5,6.3 27.105,6.712 28.4,6.7 29,6.7 29.5,6.7 21,6.8 21.5,6.8 27.1,7.2 28.4,7.2 29,7.2 29.5,7.2 21,7.3 21.5,7.3
pads on no net: AC1.1 AC1.2 AC1.3 AC1.4 AC1.9 AC1.10 AC1.11 CON3.A CON3.B CON4.A CON4.B CON5.A CON5.B CON9.A CON9.B CON10.A CON10.B IC5.4 IC6.24 IC6.26 IC6.27 IC6.37 IC6.38 IC6.39 IC6.40 IC7.1 IC7.2 IC8.4 IC9.4 J1.MP1 J1.MP2
copper on no net:
  other v1: 23.9,4.9 24.4,4.9 24.9,4.9 25.4,4.9 25.9,4.9 26.4,4.9

## Polygon pours and split planes (outlines as drawn)
GND on Top Layer "GND_L01_P026" (solid, pour order 26): 0,25 91,25 91,0 0,0
12V on Top Layer "12V_L01_P009" (solid, pour order 9): 1,11.5 1.25,11.25 10.5,11.25 10.75,11.5 10.75,17.5 5.1,17.5 5.1,15.8 1,15.8
3.3V on Top Layer "3.3V_L01_P022" (solid, pour order 22): 50.7,16 48.8,17.9 48.1,17.9 47.9,18.1 47.9,20 48.1,20.2 48.3,20.2 49.5,20.2 49.5,18.9 50.6,17.8 54.4,17.8 54.6,17.6 54.6,16 54.2,16
5V on Top Layer "5V_L01_P021" (solid, pour order 21): 42.4,4.8 38,4.8 36,6.8 36,8.9 36.2,9.1 37.6,9.1 37.9,8.8 37.9,6.9 38.3,6.5 42.5,6.5 42.7,6.3 42.7,4.9
12V on Top Layer "12V_L01_P002" (solid, pour order 2): 32,10 33,9 35.3,9 35.7,8.6 35.7,6.6 35.5,6.4 33.9,6.4 33.9,6.7 33.5,7.1 31.3,7.1 31.3,8 29.4,9.9 29.4,15 31,16.8 31.6,16.8 31.6,17.7 32,17.7
5V on Top Layer "5V_L01_P005" (solid, pour order 5): 42,18 42.1,18 42.6,18.5 47.2,18.5 47.3,18.6 47.3,20.1 47.2,20.2 42.5,20.2 42,20.7 42,23.2 39,23.2 38.7,22.9 38.7,10.7 40.8,10.7 42,11.9 42.8,11.9 43.2,12.3 43.2,14.2 43.1,14.3 42.7,14.3 42,15 42,17.2
GND on Top Layer "GND_L01_P003" (solid, pour order 3): 35.4,10 35.4,10.9 38.4,10.9 38.4,17.3 38,17.7 32.2,17.7 32.2,10.2 32.4,10
VCC on Top Layer "VCC_L01_P006" (solid, pour order 6): 21.3,7.6 21.8,7.6 21.8,5.7 21.7,5.6 16.9,5.6 16.7,5.8 16.7,7.4 15.7,8.4 15.7,10.4 15.2,10.9 11.462,10.9 11.2,11.162 11.2,17.3 10.75,17.75 10.25,17.75 10,18 6.5,18 6.5,19.75 7.25,20.5 7.25,22.75 9,22.75 9,22.25 9.55,21.7 12.9,21.7 13.5,22.3 16.8,22.3 17.2,21.9 19.4,21.9 19.7,22.2 25.7,22.2 25.8,22.1 25.8,17.7 25.5,17.4 23.7,17.4 23.6,17.5 23.6,19.1 23.3,19.4 22.4,19.4 22.1,19.7 22.1,21.2 22,21.2 21.8,21.4 19.9,21.4 18.3,19.8 18.3,17.4 18.1,17.2 17.2,17.2 17,17.4 17,19.1 16.8,19.3 15.6,19.3 15.3,19.6 15.3,21.1 15.1,21.3 13.2,21.3 11.275,19.375 12.6,18.05 12.6,12.2 13,11.8 15.8,11.8 16.7,10.9 16.7,8.6 17.3,8 18.8,8 18.8,8.7 19.2,9.1 20.4,9.1 20.5,9 20.5,8.4
NetC29_2 on Top Layer "NETC29_2_L01_P001" (solid, pour order 1): 32.2,19.4 32.2,18.7 32.7,18.7 33.2,18.7 35.9,18.7 35.9,23 34.4,23 33.9,23.5 33.9,24 33,24 32.8,23.8 32.8,22.9 32.9,22.6 32.9,19.663
GND on Bottom Layer "GND_L02_P025" (solid, pour order 25): 0,25 91,25 91,0 0,0
VCC on Bottom Layer "VCC_L02_P017" (solid, pour order 17): 20.7,7.6 20.7,5.4 21.2,5.4 22.3,4.3 28,4.3 29.3,5.6 30.9,5.6 30.9,7.8 27.3,7.8 27.2,7.7 26.6,7.7 26.5,7.6 26.5,5.7 26.2,5.4 22.8,5.4 21.9,6.3 21.9,7.6
12V on Bottom Layer "12V_L02_P008" (solid, pour order 8): 4.3,15.75 4.3,11.55 4.25,11.5 0.75,11.5 0.75,15.5 1,15.75
NetCON11_1 on Bottom Layer "NETCON11_1_L02_P010" (solid, pour order 10): 13.7,17.7 13.7,11.7 5.25,11.7 5.25,17.7

## Other copper
Top Layer:
  region: 4.939,51.867
  region: 4.939,51.867
  region: 4.939,51.867
  region: 4.939,51.867
  region: 4.939,51.867
  region: 4.939,51.867
  region: 4.939,51.867
  region: 4.939,51.867
  region: 4.939,51.867
  region: 4.939,51.867
  region: 4.939,51.867
  region: 4.939,51.867
  region: 4.939,51.867
  region: 4.939,51.867
  region: 4.939,51.867
  region: 4.939,51.867
  region: 4.939,51.867
  region: 4.939,51.867
  region: 4.939,51.867
  region: 4.939,51.867
  region: 4.939,51.867
  region: 4.939,51.867
  region: 4.939,51.867

## Silkscreen, mask and mechanical layers (free items; w line width, h text height)
Top Overlay:
  text "SER v3 01.2025" at 54.754,0.754 h1.52